# EAGLE board rekick006-panelized (EAGLE 4.16), part 1 of 2
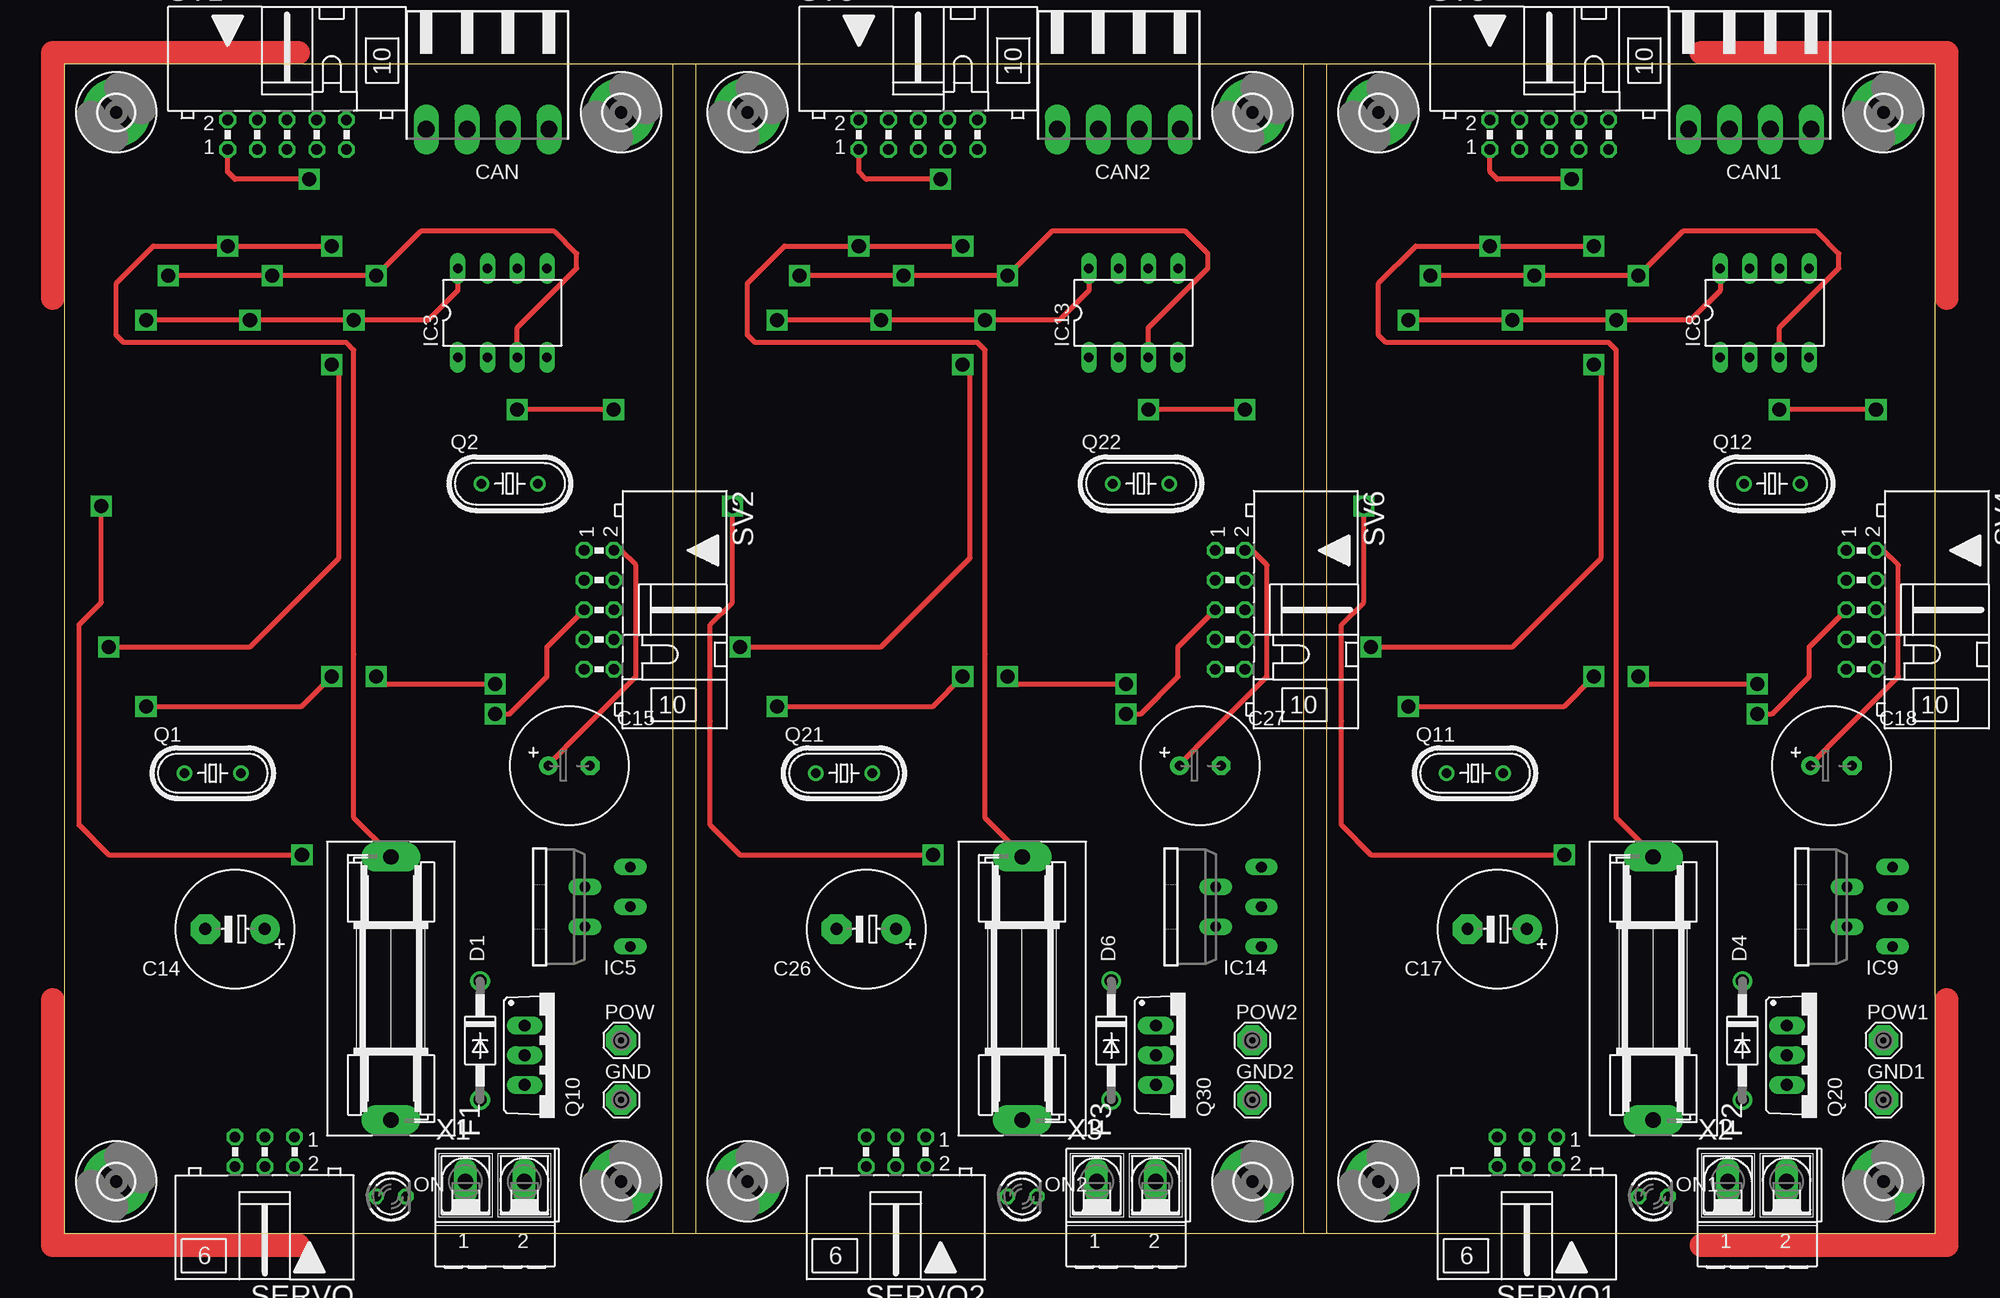
[diagram p0: board, top side]
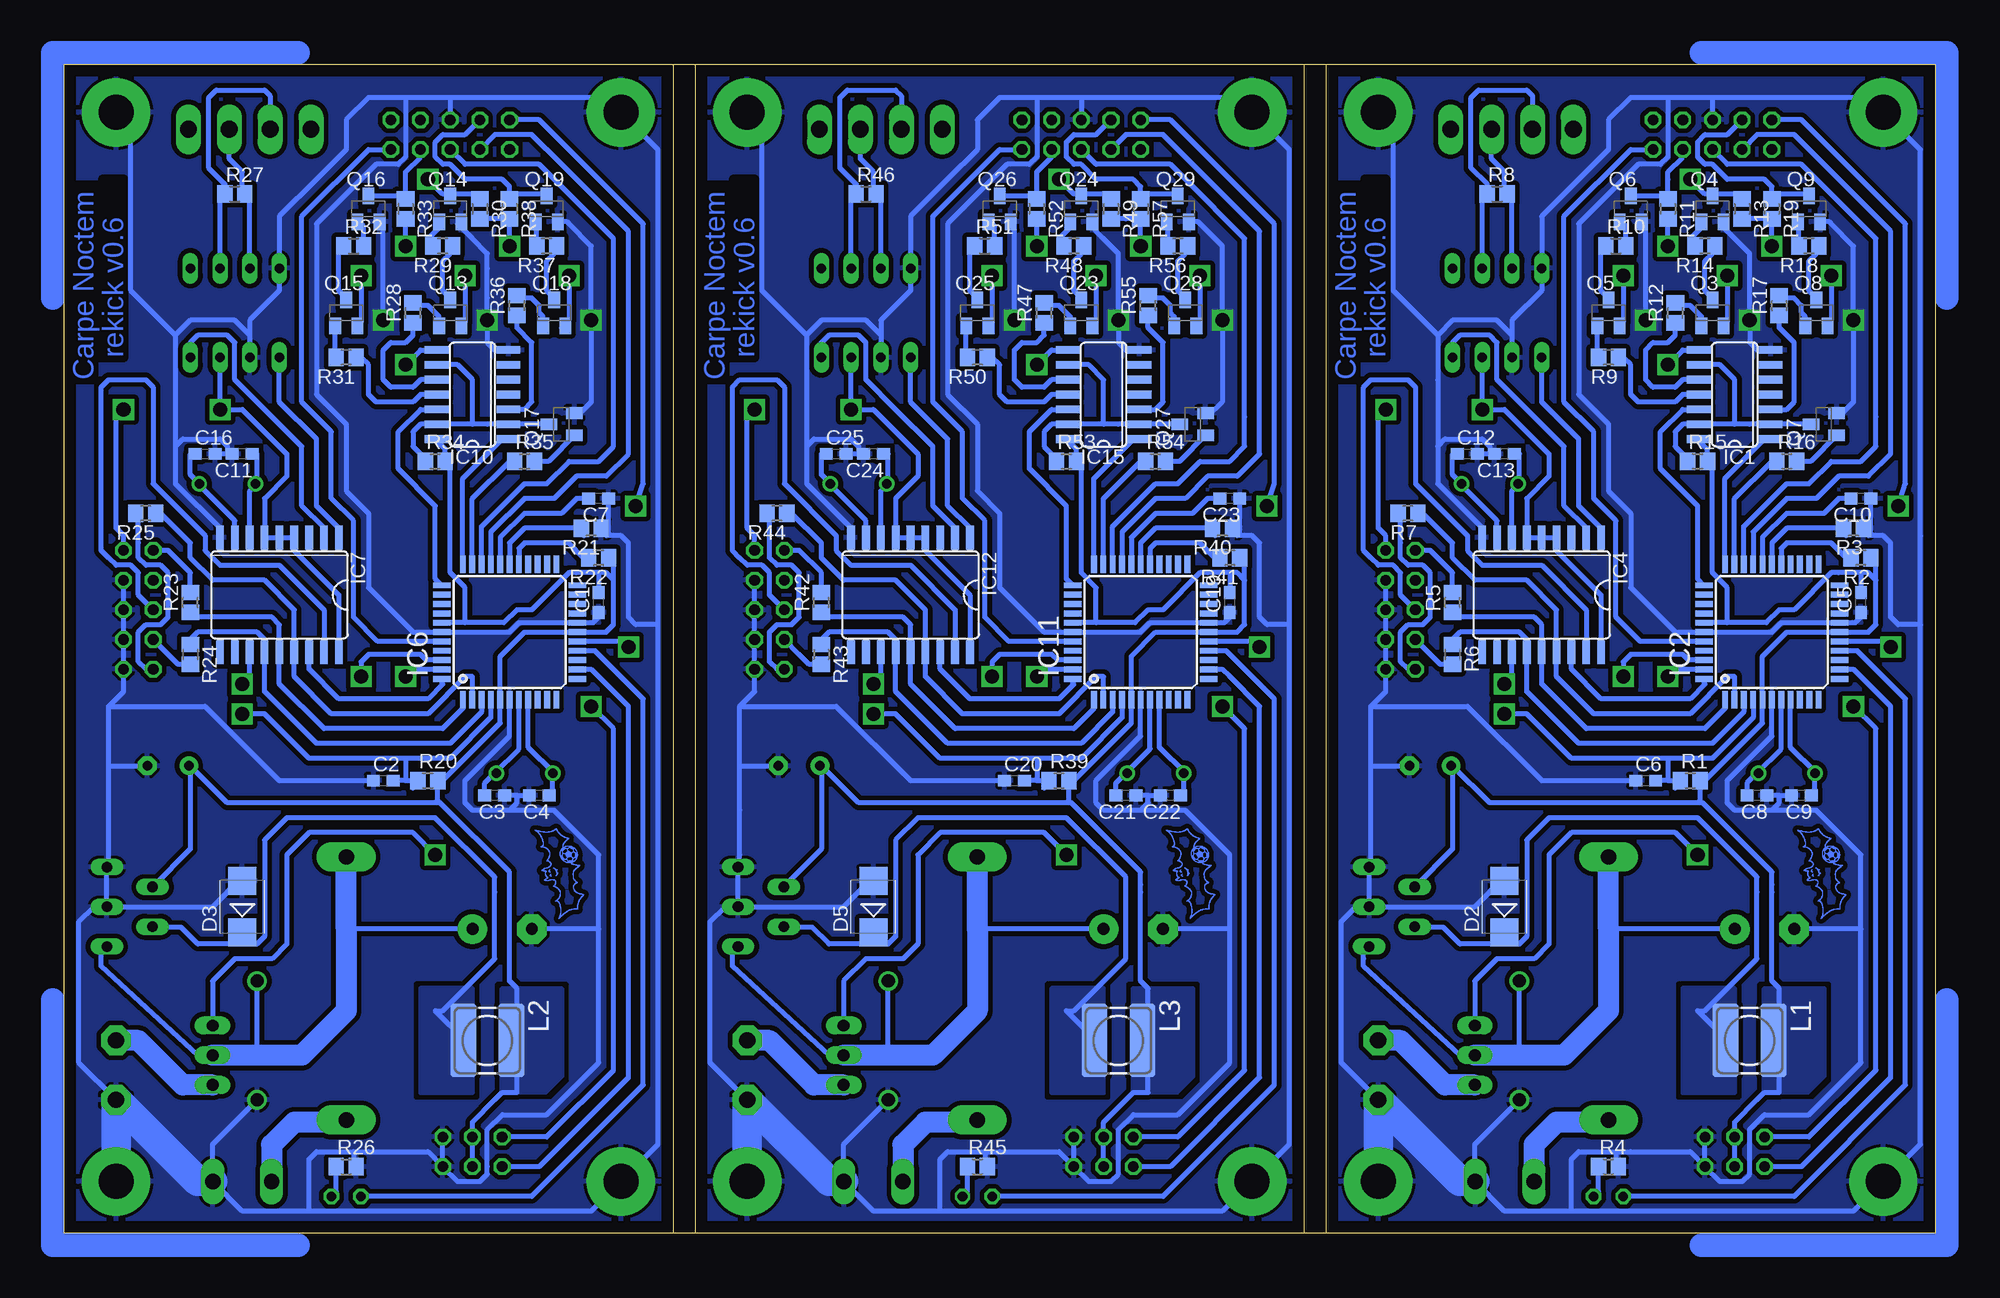
[diagram p1: board, bottom side, seen from below]

Size 160 x 100 mm. Coordinates in mm from the lower left corner, seen from the top.
Outline: 0,0 160,0
Outline: 160,0 160,100
Outline: 160,100 0,100
Outline: 0,100 0,0
Outline: 0,0 52.05,0 52.05,100 0,100
Outline: 0,100 0,0
Outline: 160,0 107.95,0 107.95,100 160,100
Outline: 160,0 160,100
Outline: 53.98,0 106.03,0 106.03,100 53.98,100 53.98,0
Copper layers (1*16): Top 0.035mm / dielectric 1.5mm / Bottom 0.035mm
Design rules "default": minimum track width 10mil, minimum drill 24mil, track to track 8mil, track to pad 8mil, pad to pad 8mil, via to via 8mil, smd to smd 8mil, copper to edge 40mil, drill to drill 8mil, minimum pad ring 10mil, minimum via ring 8mil, stop-mask expansion 4mil, vias tented up to drill 0mil, thermal gap 10mil
Net classes: 1 Power: width 0.406 mm

## Footprints (pad centres in the part's own frame; a part is rotated, then mirrored left to right if it is on the bottom)
C0603 = smd 1.1 x 1: 1 -0.85,0; 2 0.85,0
E5-10,5 = drill 1.016 pad 2.54 round: + -2.54,0 | drill 1.016 pad 2.54 octagon: - 2.54,0
E3,5-10 = drill 0.813 pad 1.6 round: + -1.778,0 | drill 0.813 pad 1.6 octagon: - 1.778,0
90-4 = drill 1.422 long: 1 -5.25,5.25; 2 -1.75,5.25; 3 1.75,5.25; 4 5.25,5.25
DO41-10 = drill 1.118 round: A 5.08,0; C -5.08,0
SMB = smd 2.4 x 2.4: A 2.2,0; C -2.2,0
SH22,5A = drill 1.321 pad 2.54 long: 1 -11.252,0; 2 11.252,0
SE14 = drill 1.397 pad 2.54 octagon: MP 0,0
3,0-PAD = drill 3 pad 5.842 round: B3,0 0,0
SO14 = smd 0.66 x 2.032: 1 -3.81,-3.073; 2 -2.54,-3.073; 3 -1.27,-3.073; 4 0,-3.073; 5 1.27,-3.073; 6 2.54,-3.073; 7 3.81,-3.073; 8 3.81,3.073; 9 2.54,3.073; 10 1.27,3.073; 11 0,3.073; 12 -1.27,3.073; 13 -2.54,3.073; 14 -3.81,3.073
TQFP44 = smd 1.5 x 0.5: 1 -5.8,4; 2 -5.8,3.2; 3 -5.8,2.4; 4 -5.8,1.6; 5 -5.8,0.8; 6 -5.8,0; 7 -5.8,-0.8; 8 -5.8,-1.6; 9 -5.8,-2.4; 10 -5.8,-3.2; 11 -5.8,-4; 23 5.8,-4; 24 5.8,-3.2; 25 5.8,-2.4; 26 5.8,-1.6; 27 5.8,-0.8; 28 5.8,0; 29 5.8,0.8; 30 5.8,1.6; 31 5.8,2.4; 32 5.8,3.2; 33 5.8,4 | smd 0.5 x 1.5: 12 -4,-5.8; 13 -3.2,-5.8; 14 -2.4,-5.8; 15 -1.6,-5.8; 16 -0.8,-5.8; 17 0,-5.8; 18 0.8,-5.8; 19 1.6,-5.8; 20 2.4,-5.8; 21 3.2,-5.8; 22 4,-5.8; 34 4,5.8; 35 3.2,5.8; 36 2.4,5.8; 37 1.6,5.8; 38 0.8,5.8; 39 0,5.8; 40 -0.8,5.8; 41 -1.6,5.8; 42 -2.4,5.8; 43 -3.2,5.8; 44 -4,5.8
DIL08 = drill 0.813 long: 1 -3.81,-3.81; 2 -1.27,-3.81; 3 1.27,-3.81; 4 3.81,-3.81; 5 3.81,3.81; 6 1.27,3.81; 7 -1.27,3.81; 8 -3.81,3.81
SO18L = smd 0.66 x 2.032: 1 -5.08,-4.902; 2 -3.81,-4.902; 3 -2.54,-4.902; 4 -1.27,-4.902; 5 0,-4.902; 6 1.27,-4.902; 7 2.54,-4.902; 8 3.81,-4.902; 9 5.08,-4.902; 10 5.08,4.902; 11 3.81,4.902; 12 2.54,4.902; 13 1.27,4.902; 14 0,4.902; 15 -1.27,4.902; 16 -2.54,4.902; 17 -3.81,4.902; 18 -5.08,4.902
TO220-51 = drill 0.9 long: 1 -3.4,-8.4; 2 -1.7,-4.5; 3 0,-8.4; 4 1.7,-4.5; 5 3.4,-8.4
POWER-CHOKE_WE-TPC = smd 6.3 x 2.2: 1 0,2.05; 2 0,-2.05
LED3MM = drill 0.813 octagon: A -1.27,0; K 1.27,0
HC49/S = drill 0.813 round: 1 -2.413,0; 2 2.413,0
HC49U-V = drill 0.813 round: 1 -2.413,0; 2 2.413,0
SOT23-BEC = smd 1 x 1.4: B -0.95,-1.1; C 0,1.1; E 0.95,-1.1
TO220BV = drill 1.016 long: D 0,-2.54; G -2.54,-2.54; S 2.54,-2.54
R0805 = smd 1.3 x 1.5: 1 -0.85,0; 2 0.85,0
ML6L = drill 0.914 octagon: 1 -2.54,-1.27; 2 -2.54,1.27; 3 0,-1.27; 4 0,1.27; 5 2.54,-1.27; 6 2.54,1.27
ML10L = drill 0.914 octagon: 1 -5.08,-1.27; 2 -5.08,1.27; 3 -2.54,-1.27; 4 -2.54,1.27; 5 0,-1.27; 6 0,1.27; 7 2.54,-1.27; 8 2.54,1.27; 9 5.08,-1.27; 10 5.08,1.27
AK500/2-H = drill 1.321 long: 1 -2.515,0; 2 2.515,0

## Placement (x,y rotation side)
C1  100n  [C0603]  114.3,53.98 90 bottom
C2  100n  [C0603]  132.72,38.73 0 bottom
C3  22p  [C0603]  123.19,37.47 180 bottom
C4  22p  [C0603]  119.38,37.47 180 bottom
C5  100n  [C0603]  6.35,53.98 90 bottom
C6  100n  [C0603]  24.77,38.73 0 bottom
C7  100n  [C0603]  114.3,62.87 180 bottom
C8  22p  [C0603]  15.24,37.47 180 bottom
C9  22p  [C0603]  11.43,37.47 180 bottom
C10  100n  [C0603]  6.35,62.87 180 bottom
C11  22p  [C0603]  144.78,66.67 180 bottom
C12  22p  [C0603]  40.01,66.67 0 bottom
C13  22p  [C0603]  36.83,66.67 180 bottom
C14  220µF/35V  [E5-10,5]  14.61,26.04 180 top
C15  220µF/25V  [E3,5-10]  43.18,40.01 0 top
C16  22p  [C0603]  147.96,66.67 0 bottom
C17  220µF/35V  [E5-10,5]  122.56,26.04 180 top
C18  220µF/25V  [E3,5-10]  151.13,40.01 0 top
C19  100n  [C0603]  60.33,53.98 90 bottom
C20  100n  [C0603]  78.74,38.73 0 bottom
C21  22p  [C0603]  69.22,37.47 180 bottom
C22  22p  [C0603]  65.41,37.47 180 bottom
C23  100n  [C0603]  60.33,62.87 180 bottom
C24  22p  [C0603]  90.81,66.67 180 bottom
C25  22p  [C0603]  93.98,66.67 0 bottom
C26  220µF/35V  [E5-10,5]  68.58,26.04 180 top
C27  220µF/25V  [E3,5-10]  97.16,40.01 0 top
CAN  [90-4]  36.2,99.69 180 top
CAN1  [90-4]  144.15,99.69 180 top
CAN2  [90-4]  90.17,99.69 180 top
D1  1N4001  [DO41-10]  35.56,16.51 270 top
D2  MBRS360  [SMB]  36.83,27.94 90 bottom
D3  MBRS360  [SMB]  144.78,27.94 90 bottom
D4  1N4001  [DO41-10]  143.51,16.51 270 top
D5  MBRS360  [SMB]  90.81,27.94 90 bottom
D6  1N4001  [DO41-10]  89.53,16.51 270 top
F1  [SH22,5A]  27.94,20.95 90 top
F2  [SH22,5A]  135.89,20.95 90 top
F3  [SH22,5A]  81.92,20.95 90 top
GND  SE14  [SE14]  47.62,11.43 0 top
GND1  SE14  [SE14]  155.57,11.43 0 top
GND2  SE14  [SE14]  101.6,11.43 0 top
H1  MOUNT-PAD-ROUND3.0  [3,0-PAD]  4.45,95.89 0 top
H2  MOUNT-PAD-ROUND3.0  [3,0-PAD]  4.45,4.45 0 top
H3  MOUNT-PAD-ROUND3.0  [3,0-PAD]  47.62,95.89 0 top
H4  MOUNT-PAD-ROUND3.0  [3,0-PAD]  47.62,4.45 0 top
H5  MOUNT-PAD-ROUND3.0  [3,0-PAD]  112.39,95.89 0 top
H6  MOUNT-PAD-ROUND3.0  [3,0-PAD]  112.39,4.45 0 top
H7  MOUNT-PAD-ROUND3.0  [3,0-PAD]  155.57,95.89 0 top
H8  MOUNT-PAD-ROUND3.0  [3,0-PAD]  155.57,4.45 0 top
H9  MOUNT-PAD-ROUND3.0  [3,0-PAD]  58.42,95.89 0 top
H10  MOUNT-PAD-ROUND3.0  [3,0-PAD]  58.42,4.45 0 top
H11  MOUNT-PAD-ROUND3.0  [3,0-PAD]  101.6,95.89 0 top
H12  MOUNT-PAD-ROUND3.0  [3,0-PAD]  101.6,4.45 0 top
IC1  4081D  [SO14]  17.14,71.75 90 bottom
IC2  MEGA32-A  [TQFP44]  13.97,51.44 90 bottom
IC3  PCA82C250  [DIL08]  37.47,78.74 0 top
IC4  MCP2515-E/SO  [SO18L]  33.66,54.61 180 bottom
IC5  LM2576-5V  [TO220-51]  40.01,27.94 90 top
IC6  MEGA32-A  [TQFP44]  121.92,51.44 90 bottom
IC7  MCP2515-E/SO  [SO18L]  141.6,54.61 180 bottom
IC8  PCA82C250  [DIL08]  145.41,78.74 0 top
IC9  LM2576-5V  [TO220-51]  147.96,27.94 90 top
IC10  4081D  [SO14]  125.09,71.75 90 bottom
IC11  MEGA32-A  [TQFP44]  67.94,51.44 90 bottom
IC12  MCP2515-E/SO  [SO18L]  87.63,54.61 180 bottom
IC13  PCA82C250  [DIL08]  91.44,78.74 0 top
IC14  LM2576-5V  [TO220-51]  93.98,27.94 90 top
IC15  4081D  [SO14]  71.12,71.75 90 bottom
L1  L-PISR 100u  [POWER-CHOKE_WE-TPC]  15.88,16.51 270 bottom
L2  L-PISR 100u  [POWER-CHOKE_WE-TPC]  123.83,16.51 270 bottom
L3  L-PISR 100u  [POWER-CHOKE_WE-TPC]  69.85,16.51 270 bottom
ON  green  [LED3MM]  27.94,3.17 0 top
ON1  green  [LED3MM]  135.89,3.17 0 top
ON2  green  [LED3MM]  81.92,3.17 0 top
POW  SE14  [SE14]  47.62,16.51 0 top
POW1  SE14  [SE14]  155.57,16.51 0 top
POW2  SE14  [SE14]  101.6,16.51 0 top
Q1  16MHz  [HC49/S]  12.7,39.37 0 top
Q2  16MHz  [HC49U-V]  38.1,64.14 0 top
Q3  BC807  [SOT23-BEC]  19.05,78.74 0 bottom
Q4  BC817  [SOT23-BEC]  19.05,87.63 0 bottom
Q5  BC807  [SOT23-BEC]  27.94,78.74 0 bottom
Q6  BC817  [SOT23-BEC]  26.04,87.63 0 bottom
Q7  BC817  [SOT23-BEC]  9.53,69.22 90 bottom
Q8  BC807  [SOT23-BEC]  10.16,78.74 0 bottom
Q9  BC817  [SOT23-BEC]  10.79,87.63 0 bottom
Q10  IRF740  [TO220BV]  41.91,15.24 270 top
Q11  16MHz  [HC49/S]  120.65,39.37 0 top
Q12  16MHz  [HC49U-V]  146.05,64.14 0 top
Q13  BC807  [SOT23-BEC]  127,78.74 0 bottom
Q14  BC817  [SOT23-BEC]  127,87.63 0 bottom
Q15  BC807  [SOT23-BEC]  135.89,78.74 0 bottom
Q16  BC817  [SOT23-BEC]  133.99,87.63 0 bottom
Q17  BC817  [SOT23-BEC]  117.47,69.22 90 bottom
Q18  BC807  [SOT23-BEC]  118.11,78.74 0 bottom
Q19  BC817  [SOT23-BEC]  118.75,87.63 0 bottom
Q20  IRF740  [TO220BV]  149.86,15.24 270 top
Q21  16MHz  [HC49/S]  66.67,39.37 0 top
Q22  16MHz  [HC49U-V]  92.08,64.14 0 top
Q23  BC807  [SOT23-BEC]  73.03,78.74 0 bottom
Q24  BC817  [SOT23-BEC]  73.03,87.63 0 bottom
Q25  BC807  [SOT23-BEC]  81.92,78.74 0 bottom
Q26  BC817  [SOT23-BEC]  80.01,87.63 0 bottom
Q27  BC817  [SOT23-BEC]  63.5,69.22 90 bottom
Q28  BC807  [SOT23-BEC]  64.14,78.74 0 bottom
Q29  BC817  [SOT23-BEC]  64.77,87.63 0 bottom
Q30  IRF740  [TO220BV]  95.89,15.24 270 top
R1  10k  [R0805]  20.95,38.73 0 bottom
R2  0  [R0805]  6.35,57.78 180 bottom
R3  0  [R0805]  6.99,60.33 180 bottom
R4  2k7  [R0805]  27.94,5.71 0 bottom
R5  4k7  [R0805]  41.27,53.98 90 bottom
R6  4k7  [R0805]  41.27,49.53 270 bottom
R7  4k7  [R0805]  45.09,61.59 180 bottom
R8  4k7  [R0805]  37.47,88.9 0 bottom
R9  1k  [R0805]  27.94,74.93 180 bottom
R10  4k7  [R0805]  27.3,84.45 0 bottom
R11  10k  [R0805]  22.86,87.63 270 bottom
R12  1k  [R0805]  22.23,78.74 90 bottom
R13  330  [R0805]  16.51,87.63 270 bottom
R14  4k7  [R0805]  19.68,84.45 180 bottom
R15  10k  [R0805]  20.32,66.04 0 bottom
R16  1k  [R0805]  12.7,66.04 0 bottom
R17  1k  [R0805]  13.34,79.38 90 bottom
R18  4k7  [R0805]  10.79,84.45 180 bottom
R19  10k  [R0805]  13.97,87.63 270 bottom
R20  10k  [R0805]  128.91,38.73 0 bottom
R21  0  [R0805]  114.94,60.33 180 bottom
R22  0  [R0805]  114.3,57.78 180 bottom
R23  4k7  [R0805]  149.22,53.98 90 bottom
R24  4k7  [R0805]  149.22,49.53 270 bottom
R25  4k7  [R0805]  153.03,61.59 180 bottom
R26  2k7  [R0805]  135.89,5.71 0 bottom
R27  4k7  [R0805]  145.41,88.9 0 bottom
R28  1k  [R0805]  130.18,78.74 90 bottom
R29  4k7  [R0805]  127.64,84.45 180 bottom
R30  330  [R0805]  124.46,87.63 270 bottom
R31  1k  [R0805]  135.89,74.93 180 bottom
R32  4k7  [R0805]  135.25,84.45 0 bottom
R33  10k  [R0805]  130.81,87.63 270 bottom
R34  10k  [R0805]  128.27,66.04 0 bottom
R35  1k  [R0805]  120.65,66.04 0 bottom
R36  1k  [R0805]  121.28,79.38 90 bottom
R37  4k7  [R0805]  118.75,84.45 180 bottom
R38  10k  [R0805]  121.92,87.63 270 bottom
R39  10k  [R0805]  74.93,38.73 0 bottom
R40  0  [R0805]  60.96,60.33 180 bottom
R41  0  [R0805]  60.33,57.78 180 bottom
R42  4k7  [R0805]  95.25,53.98 90 bottom
R43  4k7  [R0805]  95.25,49.53 270 bottom
R44  4k7  [R0805]  99.06,61.59 180 bottom
R45  2k7  [R0805]  81.92,5.71 0 bottom
R46  4k7  [R0805]  91.44,88.9 0 bottom
R47  1k  [R0805]  76.2,78.74 90 bottom
R48  4k7  [R0805]  73.66,84.45 180 bottom
R49  330  [R0805]  70.48,87.63 270 bottom
R50  1k  [R0805]  81.92,74.93 180 bottom
R51  4k7  [R0805]  81.28,84.45 0 bottom
R52  10k  [R0805]  76.83,87.63 270 bottom
R53  10k  [R0805]  74.3,66.04 0 bottom
R54  1k  [R0805]  66.67,66.04 0 bottom
R55  1k  [R0805]  67.31,79.38 90 bottom
R56  4k7  [R0805]  64.77,84.45 180 bottom
R57  10k  [R0805]  67.94,87.63 270 bottom
SERVO  [ML6L]  17.14,6.99 180 top
SERVO1  [ML6L]  125.09,6.99 180 top
SERVO2  [ML6L]  71.12,6.99 180 top
SV1  [ML10L]  19.05,93.98 0 top
SV2  [ML10L]  45.72,53.34 270 top
SV3  [ML10L]  127,93.98 0 top
SV4  [ML10L]  153.67,53.34 270 top
SV5  [ML10L]  73.03,93.98 0 top
SV6  [ML10L]  99.69,53.34 270 top
U$1  [CN-LOGO-WIRE]  9.53,31.11 90 bottom
U$2  [CN-LOGO-WIRE]  117.47,31.11 90 bottom
U$3  [CN-LOGO-WIRE]  63.5,31.11 90 bottom
X1  [AK500/2-H]  36.83,4.45 0 top
X2  [AK500/2-H]  144.78,4.45 0 top
X3  [AK500/2-H]  90.81,4.45 0 top

## Library data of the parts
C1-C27 L1-L3 R1-R57 = rcl
CAN CAN1 CAN2 = con-weidmueller-sl35
D1-D6 = diode
F1-F3 = fuse
GND GND1 GND2 POW POW1 POW2 = solpad
H1-H12 = holes
IC1 IC10 IC15 = 40xx
IC2 IC6 IC11 = atmel
IC3 IC8 IC13 = micro-philips
IC4 IC7 IC12 = mcp2515
IC5 IC9 IC14 = linear
ON ON1 ON2 = led
Q1 Q2 Q11 Q12 Q21 Q22 = crystal
Q3 Q5 Q8 Q13 Q15 Q18 Q23 Q25 Q28 = transistor-pnp
Q4 Q6 Q7 Q9 Q14 Q16 Q17 Q19 Q24 Q26 Q27 Q29 = transistor-npn
Q10 Q20 Q30 = transistor-power
SERVO SERVO1 SERVO2 SV1-SV6 = con-harting-ml
U$1-U$3 = carpenoctem
X1-X3 = con-ptr500

## Nets
+5V [Power]: C5.2 C15.+ IC1.14 IC2.5 IC2.17 IC2.38 IC3.3 IC4.4 IC4.5 IC4.6 IC4.18 IC5.4 L1.1 Q3.E Q5.E Q8.E R1.2 R2.1 R15.2 SERVO.3 SERVO.4 SV2.2
+5V1 [Power]: C1.2 C18.+ IC6.5 IC6.17 IC6.38 IC7.4 IC7.5 IC7.6 IC7.18 IC8.3 IC9.4 IC10.14 L2.1 Q13.E Q15.E Q18.E R20.2 R22.1 R34.2 SERVO1.3 SERVO1.4 SV4.2
+5V2 [Power]: C19.2 C27.+ IC11.5 IC11.17 IC11.38 IC12.4 IC12.5 IC12.6 IC12.18 IC13.3 IC14.4 IC15.14 L3.1 Q23.E Q25.E Q28.E R39.2 R41.1 R53.2 SERVO2.3 SERVO2.4 SV6.2
+24V [Power]: C14.+ D1.C F1.2 IC5.1 Q10.D R11.2 R13.2 R19.2
+24V1 [Power]: C17.+ D4.C F2.2 IC9.1 Q20.D R30.2 R33.2 R38.2
+24V2 [Power]: C26.+ D6.C F3.2 IC14.1 Q30.D R49.2 R52.2 R57.2
ADC_BOOST: IC2.30 SV1.3
ADC_BOOST1: IC6.30 SV3.3
ADC_BOOST2: IC11.30 SV5.3
ADC_NORM: IC2.31 SV1.5
ADC_NORM1: IC6.31 SV3.5
ADC_NORM2: IC11.31 SV5.5
CS: IC2.44 IC4.16
CS1: IC6.44 IC7.16
CS2: IC11.44 IC12.16
GND [Power]: C5.1 C6.1 C8.1 C9.2 C10.1 C12.2 C13.2 C14.- C15.- D1.A D2.A GND.MP H1.B3,0 H2.B3,0 H3.B3,0 H4.B3,0 IC1.7 IC2.6 IC2.18 IC2.39 IC3.2 IC3.8 IC4.9 IC5.3 IC5.5 Q4.E Q6.E Q7.E Q9.E R3.1 R4.2 SERVO.1 SERVO.2 SV1.6 SV2.4 SV2.6 SV2.8 SV2.10 X1.2
GND1 [Power]: C1.1 C2.1 C3.1 C4.2 C7.1 C11.2 C16.2 C17.- C18.- D3.A D4.A GND1.MP H5.B3,0 H6.B3,0 H7.B3,0 H8.B3,0 IC6.6 IC6.18 IC6.39 IC7.9 IC8.2 IC8.8 IC9.3 IC9.5 IC10.7 Q14.E Q16.E Q17.E Q19.E R21.1 R26.2 SERVO1.1 SERVO1.2 SV3.6 SV4.4 SV4.6 SV4.8 SV4.10 X2.2
GND2 [Power]: C19.1 C20.1 C21.1 C22.2 C23.1 C24.2 C25.2 C26.- C27.- D5.A D6.A GND2.MP H9.B3,0 H10.B3,0 H11.B3,0 H12.B3,0 IC11.6 IC11.18 IC11.39 IC12.9 IC13.2 IC13.8 IC14.3 IC14.5 IC15.7 Q24.E Q26.E Q27.E Q29.E R40.1 R45.2 SERVO2.1 SERVO2.2 SV5.6 SV6.4 SV6.6 SV6.8 SV6.10 X3.2
MISO: IC2.2 IC4.15 R7.1
MISO1: IC6.2 IC7.15 R25.1
MISO2: IC11.2 IC12.15 R44.1
MOSI: IC2.1 IC4.14 R5.1
MOSI1: IC6.1 IC7.14 R23.1
MOSI2: IC11.1 IC12.14 R42.1
N$1: IC2.15 ON.A
N$2: C10.2 IC2.29
N$3: IC2.27 R2.2
N$4: C9.1 IC2.8 Q1.1
N$5: C8.2 IC2.7 Q1.2
N$6: R5.2 SV2.1
N$7: IC2.28 R3.2
N$8: R6.2 SV2.7
N$9: R7.2 SV2.9
N$10: C4.1 IC6.8 Q11.1
N$11: C3.2 IC6.7 Q11.2
N$12: IC3.1 IC4.1
N$13: Q9.B R18.2
N$14: Q4.C R13.1 SV1.1
N$15: R23.2 SV4.1
N$16: R24.2 SV4.7
N$17: R25.2 SV4.9
N$18: ON1.K R26.1
N$19: IC6.15 ON1.A
N$20: C7.2 IC6.29
N$21: Q3.C R14.1
N$22: IC3.4 IC4.2
N$23: Q4.B R14.2
N$24: CAN.3 IC3.6 R8.1
N$25: Q3.B R12.2
N$26: Q10.G SV1.2
N$27: IC6.27 R22.2
N$28: Q6.B R10.2
N$29: Q6.C R11.1 SV1.7
N$30 [Power]: D2.C IC5.2 L1.2
N$31: ON.K R4.1
N$32: Q5.C R10.1
N$33: Q5.B R9.2
N$34: Q7.B R16.2
N$35: IC1.11 R9.1
N$36: IC1.10 R12.1
N$37: Q9.C R19.1 SV1.4
N$38: Q8.C R18.1
N$39: Q8.B R17.2
N$40: IC1.3 R17.1
N$41: POW.MP Q10.S
N$42: IC2.42 IC4.12
N$43 [Power]: F1.1 X1.1
N$44: IC6.28 R21.2
N$45: IC7.1 IC8.1
N$46: C11.1 IC7.7 Q12.1
N$47: C16.1 IC7.8 Q12.2
N$48: CAN1.3 IC8.6 R27.1
N$49: CAN1.2 IC8.7 R27.2
N$50: IC7.2 IC8.4
N$51 [Power]: D3.C IC9.2 L2.2
N$52: Q13.B R28.2
N$53: C13.1 IC4.7 Q2.1
N$54: C12.1 IC4.8 Q2.2
N$55: Q13.C R29.1
N$56: Q14.B R29.2
N$57: Q16.B R32.2
N$58: Q16.C R33.1 SV3.7
N$59: CAN.2 IC3.7 R8.2
N$60: Q15.C R32.1
N$61: Q15.B R31.2
N$62: Q14.C R30.1 SV3.1
N$63: Q17.B R35.2
N$64: Q19.B R37.2
N$65: Q19.C R38.1 SV3.4
N$66: Q18.C R37.1
N$67: Q18.B R36.2
N$68: POW1.MP Q20.S
N$69 [Power]: F2.1 X2.1
N$70: Q20.G SV3.2
N$71: IC10.10 R28.1
N$72: IC10.11 R31.1
N$73: IC10.3 R36.1
N$74: IC6.42 IC7.12
N$75: C22.1 IC11.8 Q21.1
N$76: C21.2 IC11.7 Q21.2
N$77: R42.2 SV6.1
N$78: R43.2 SV6.7
N$79: R44.2 SV6.9
N$80: ON2.K R45.1
N$81: IC11.15 ON2.A
N$82: C23.2 IC11.29
N$83: IC11.27 R41.2
N$84: IC11.28 R40.2
N$85: IC12.1 IC13.1
N$86: C24.1 IC12.7 Q22.1
N$87: C25.1 IC12.8 Q22.2
N$88: CAN2.3 IC13.6 R46.1
N$89: CAN2.2 IC13.7 R46.2
N$90: IC12.2 IC13.4
N$91 [Power]: D5.C IC14.2 L3.2
N$92: Q23.B R47.2
N$93: Q23.C R48.1
N$94: Q24.B R48.2
N$95: Q26.B R51.2
N$96: Q26.C R52.1 SV5.7
N$97: Q25.C R51.1
N$98: Q25.B R50.2
N$99: Q24.C R49.1 SV5.1
N$100: Q27.B R54.2
N$101: Q29.B R56.2
N$102: Q29.C R57.1 SV5.4
N$103: Q28.C R56.1
N$104: Q28.B R55.2
N$105: POW2.MP Q30.S
N$106 [Power]: F3.1 X3.1
N$107: Q30.G SV5.2
N$108: IC15.10 R47.1
N$109: IC15.11 R50.1
N$110: IC15.3 R55.1
N$111: IC11.42 IC12.12
NORM_OP: IC1.2 IC1.9 IC1.13 Q7.C R15.1
NORM_OP1: IC10.2 IC10.9 IC10.13 Q17.C R34.1
NORM_OP2: IC15.2 IC15.9 IC15.13 Q27.C R53.1
NOT_NORM_OP: IC2.32 R16.1
NOT_NORM_OP1: IC6.32 R35.1
NOT_NORM_OP2: IC11.32 R54.1
ON_HOLD: IC2.40 SV1.9
ON_HOLD1: IC6.40 SV3.9
ON_HOLD2: IC11.40 SV5.9
POW_ON: IC1.1 IC2.33
POW_ON1: IC6.33 IC10.1
POW_ON2: IC11.33 IC15.1
PWM_BOOST: IC1.8 IC2.16
PWM_BOOST1: IC6.16 IC10.8
PWM_BOOST2: IC11.16 IC15.8
PWM_SERVO1: IC2.13 SERVO.6
PWM_SERVO2: IC2.43 SERVO.5
PWM_SERVO3: IC6.13 SERVO1.6
PWM_SERVO4: IC6.43 SERVO1.5
PWM_SERVO5: IC11.13 SERVO2.6
PWM_SERVO6: IC11.43 SERVO2.5
RELEASE: IC1.12 IC2.34
RELEASE1: IC6.34 IC10.12
RELEASE2: IC11.34 IC15.12
RST: C6.2 IC2.4 IC4.17 R1.1 SV2.5
RST1: C2.2 IC6.4 IC7.17 R20.1 SV4.5
RST2: C20.2 IC11.4 IC12.17 R39.1 SV6.5
SCK: IC2.3 IC4.13 R6.1
SCK1: IC6.3 IC7.13 R24.1
SCK2: IC11.3 IC12.13 R43.1